# Altium PCB 光阵列板(打印).PcbDoc
Units mil, origin at the board's own origin, x right, y up, seen from the top; angles counter-clockwise.
Board outline 15655 x 8625 mil, 2 copper layers (Top Layer, Bottom Layer); 137 components, 77 nets, 470 pads, 0 vias.
Unrouted connection lines stored in the file: 7.
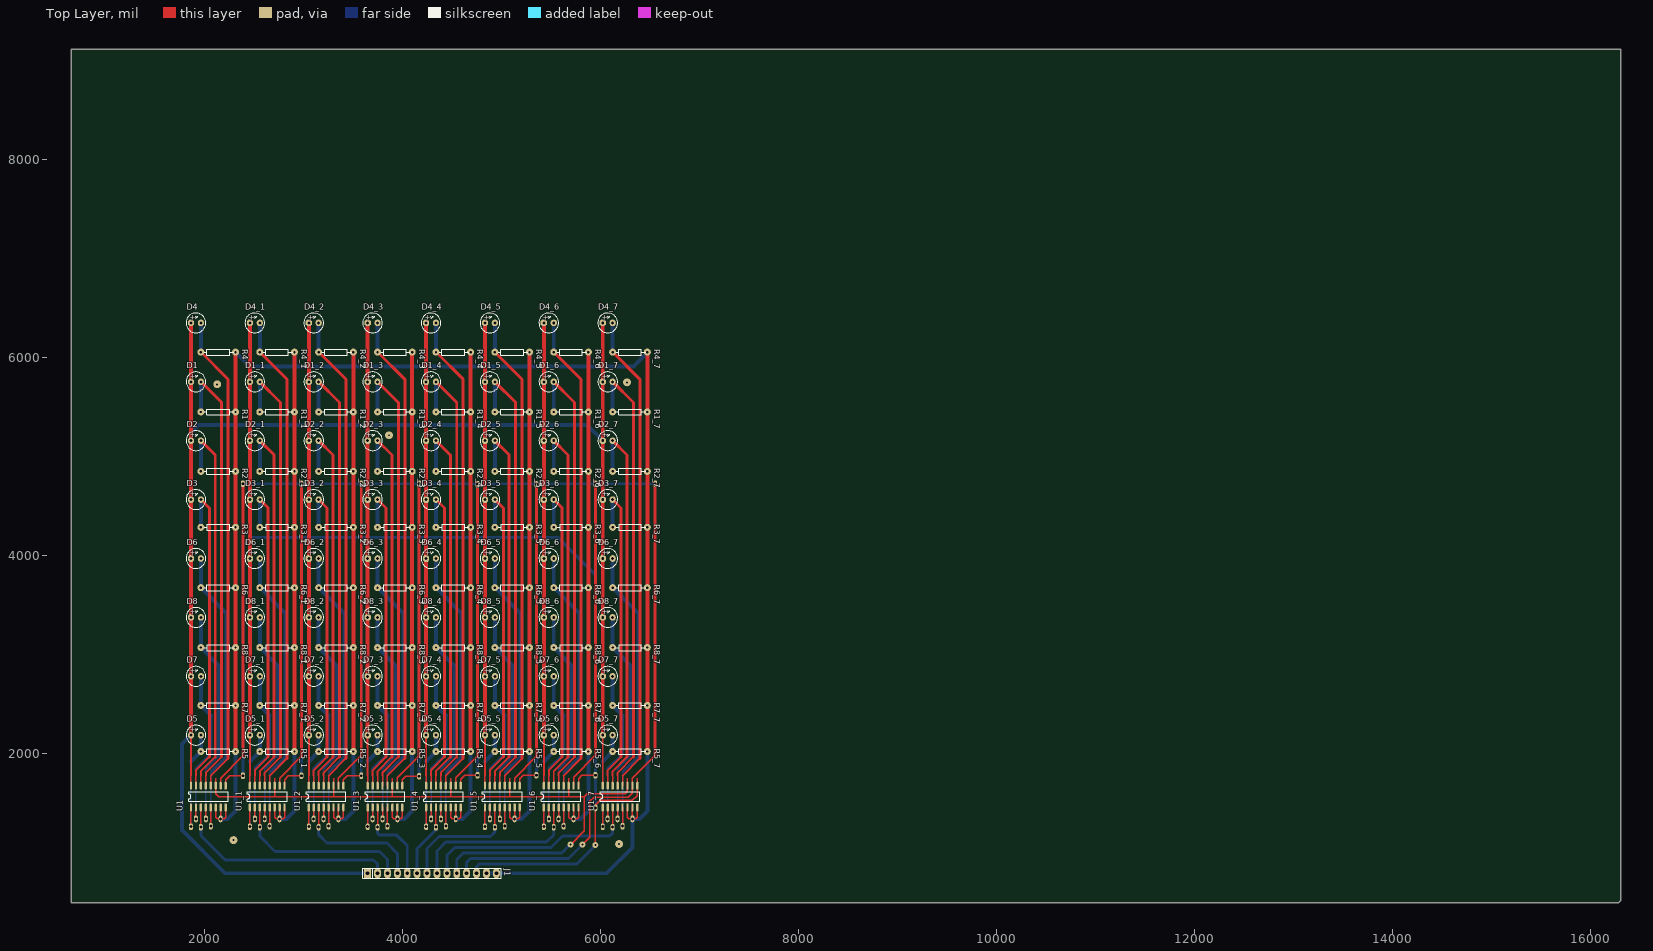
[diagram p0: Top Layer view]
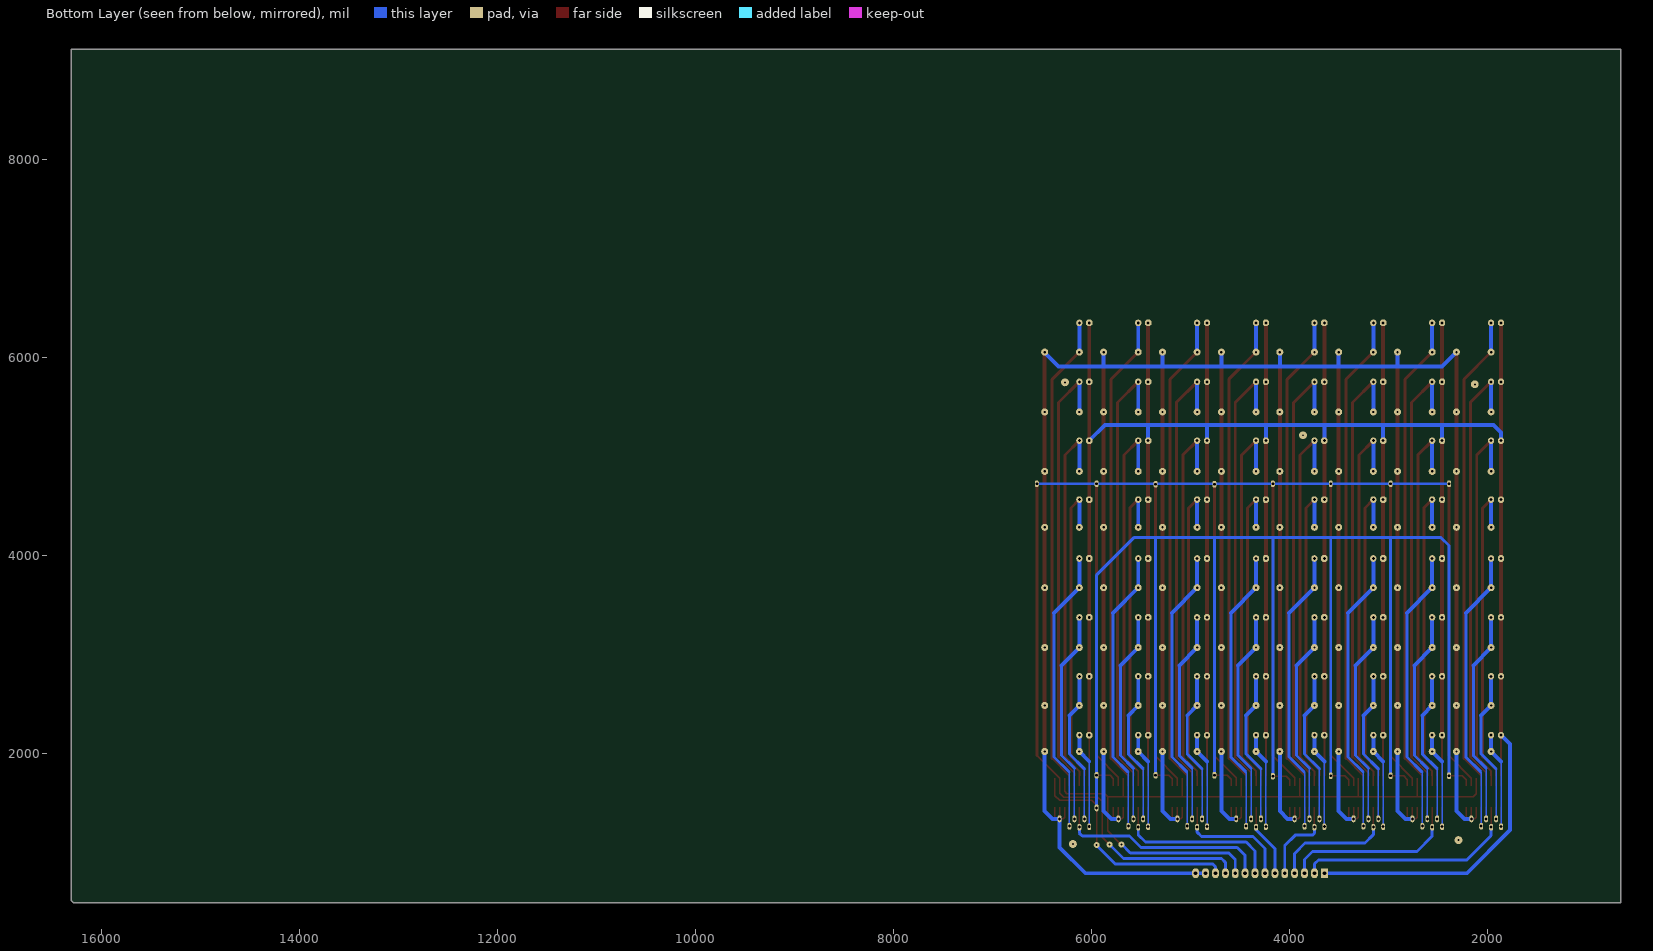
[diagram p1: Bottom Layer view, seen from below]

## Layer stack, top to bottom
Top Layer: signal copper 1.4
Dielectric: dielectric 12.6, FR-4, Dk 4.8
Bottom Layer: signal copper 1.4

## Board outline
655,490 655,9115 16310,9115 16310,515 16285,490

## Design rules (kind name [scope] priority, off if disabled: settings)
Clearance [All] p1: gap=10
ComponentClearance [All] p1 off: gap=10 collisioncheckmode=3 verticalgap=10 showdistances=FALSE
PolygonConnect [All] p1: connectstyle=Relief reliefconductorwidth=10 reliefentries=4 polygonreliefangle="90 Angle" airgapwidth=10
RoutingVias [All] p1: holewidth=28 width=50 viastyle="Through Hole" minholewidth=28 minwidth=50 maxholewidth=28 maxwidth=50
SilkscreenOverComponentPads [All] p1: minsilkscreentomaskgap=10
SolderMaskExpansion [All] p1: expansion=4
Width [All] p1: maxlimit=100 minlimit=10 preferedwidth=10
26 further rules are at their usual default settings.

## Classes and differential pairs
component class 光阵列版: D1 D2 D3 D4 D5 D6 D7 D8 D9 D10 D11 D12 D13 D14 D15 D16 D17 D18 D19 D20 D21 D22 D23 D24 D25 D26 D27 D28 D29 D30 D31 D32 D33 D34 D35 D36 D37 D38 D39 D40 D41 D42 D43 D44 D45 D46 D47 D48 D49 D50 D51 D52 D53 D54 D55 D56 D57 D58 D59 D60 D61 D62 D63 D64 J1 R1 R2 R3 R4 R5 R6 R7 R8 U1

## Components (designator, comment, footprint, x,y, rotation, side; value= is the part's Value field where it differs from the comment)
D1 "PHOTO" LED2 1865,5755 r0 top
D1_1 "PHOTO" LED2 2460,5755 r0 top (schematic designator D1)
D1_2 "PHOTO" LED2 3055,5755 r0 top (schematic designator D1)
D1_3 "PHOTO" LED2 3650,5755 r0 top (schematic designator D1)
D1_4 "PHOTO" LED2 4240,5755 r0 top (schematic designator D1)
D1_5 "PHOTO" LED2 4835,5755 r0 top (schematic designator D1)
D1_6 "PHOTO" LED2 5430,5755 r0 top (schematic designator D1)
D1_7 "PHOTO" LED2 6025,5755 r0 top (schematic designator D1)
D2 "PHOTO" LED2 1865,5160 r0 top
D2_1 "PHOTO" LED2 2460,5160 r0 top (schematic designator D2)
D2_2 "PHOTO" LED2 3055,5160 r0 top (schematic designator D2)
D2_3 "PHOTO" LED2 3650,5160 r0 top (schematic designator D2)
D2_4 "PHOTO" LED2 4240,5160 r0 top (schematic designator D2)
D2_5 "PHOTO" LED2 4835,5160 r0 top (schematic designator D2)
D2_6 "PHOTO" LED2 5430,5160 r0 top (schematic designator D2)
D2_7 "PHOTO" LED2 6025,5160 r0 top (schematic designator D2)
D3 "PHOTO" LED2 1865,4565 r0 top
D3_1 "PHOTO" LED2 2460,4565 r0 top (schematic designator D3)
D3_2 "PHOTO" LED2 3055,4565 r0 top (schematic designator D3)
D3_3 "PHOTO" LED2 3650,4565 r0 top (schematic designator D3)
D3_4 "PHOTO" LED2 4240,4565 r0 top (schematic designator D3)
D3_5 "PHOTO" LED2 4835,4565 r0 top (schematic designator D3)
D3_6 "PHOTO" LED2 5430,4565 r0 top (schematic designator D3)
D3_7 "PHOTO" LED2 6025,4565 r0 top (schematic designator D3)
D4 "PHOTO" LED2 1865,6350 r0 top
D4_1 "PHOTO" LED2 2460,6350 r0 top (schematic designator D4)
D4_2 "PHOTO" LED2 3055,6350 r0 top (schematic designator D4)
D4_3 "PHOTO" LED2 3650,6350 r0 top (schematic designator D4)
D4_4 "PHOTO" LED2 4240,6350 r0 top (schematic designator D4)
D4_5 "PHOTO" LED2 4835,6350 r0 top (schematic designator D4)
D4_6 "PHOTO" LED2 5430,6350 r0 top (schematic designator D4)
D4_7 "PHOTO" LED2 6025,6350 r0 top (schematic designator D4)
D5 "PHOTO" LED2 1865,2185 r0 top
D5_1 "PHOTO" LED2 2460,2185 r0 top (schematic designator D5)
D5_2 "PHOTO" LED2 3055,2185 r0 top (schematic designator D5)
D5_3 "PHOTO" LED2 3650,2185 r0 top (schematic designator D5)
D5_4 "PHOTO" LED2 4240,2185 r0 top (schematic designator D5)
D5_5 "PHOTO" LED2 4835,2185 r0 top (schematic designator D5)
D5_6 "PHOTO" LED2 5430,2185 r0 top (schematic designator D5)
D5_7 "PHOTO" LED2 6025,2185 r0 top (schematic designator D5)
D6 "PHOTO" LED2 1865,3970 r0 top
D6_1 "PHOTO" LED2 2460,3970 r0 top (schematic designator D6)
D6_2 "PHOTO" LED2 3055,3970 r0 top (schematic designator D6)
D6_3 "PHOTO" LED2 3650,3970 r0 top (schematic designator D6)
D6_4 "PHOTO" LED2 4240,3970 r0 top (schematic designator D6)
D6_5 "PHOTO" LED2 4835,3970 r0 top (schematic designator D6)
D6_6 "PHOTO" LED2 5430,3970 r0 top (schematic designator D6)
D6_7 "PHOTO" LED2 6025,3970 r0 top (schematic designator D6)
D7 "PHOTO" LED2 1865,2780 r0 top
D7_1 "PHOTO" LED2 2460,2780 r0 top (schematic designator D7)
D7_2 "PHOTO" LED2 3055,2780 r0 top (schematic designator D7)
D7_3 "PHOTO" LED2 3650,2780 r0 top (schematic designator D7)
D7_4 "PHOTO" LED2 4240,2780 r0 top (schematic designator D7)
D7_5 "PHOTO" LED2 4835,2780 r0 top (schematic designator D7)
D7_6 "PHOTO" LED2 5430,2780 r0 top (schematic designator D7)
D7_7 "PHOTO" LED2 6025,2780 r0 top (schematic designator D7)
D8 "PHOTO" LED2 1865,3375 r0 top
D8_1 "PHOTO" LED2 2460,3375 r0 top (schematic designator D8)
D8_2 "PHOTO" LED2 3055,3375 r0 top (schematic designator D8)
D8_3 "PHOTO" LED2 3650,3375 r0 top (schematic designator D8)
D8_4 "PHOTO" LED2 4240,3375 r0 top (schematic designator D8)
D8_5 "PHOTO" LED2 4835,3375 r0 top (schematic designator D8)
D8_6 "PHOTO" LED2 5430,3375 r0 top (schematic designator D8)
D8_7 "PHOTO" LED2 6025,3375 r0 top (schematic designator D8)
J1 "CON14" sip-14 3650,790 r0 top
R1 "RES" AXIAL0.3 1965,5450 r0 top
R1_1 "RES" AXIAL0.3 2560,5450 r0 top (schematic designator R1)
R1_2 "RES" AXIAL0.3 3155,5450 r0 top (schematic designator R1)
R1_3 "RES" AXIAL0.3 3750,5450 r0 top (schematic designator R1)
R1_4 "RES" AXIAL0.3 4340,5450 r0 top (schematic designator R1)
R1_5 "RES" AXIAL0.3 4935,5450 r0 top (schematic designator R1)
R1_6 "RES" AXIAL0.3 5530,5450 r0 top (schematic designator R1)
R1_7 "RES" AXIAL0.3 6125,5450 r0 top (schematic designator R1)
R2 "RES" AXIAL0.3 1965,4850 r0 top
R2_1 "RES" AXIAL0.3 2560,4850 r0 top (schematic designator R2)
R2_2 "RES" AXIAL0.3 3155,4850 r0 top (schematic designator R2)
R2_3 "RES" AXIAL0.3 3750,4850 r0 top (schematic designator R2)
R2_4 "RES" AXIAL0.3 4340,4850 r0 top (schematic designator R2)
R2_5 "RES" AXIAL0.3 4935,4850 r0 top (schematic designator R2)
R2_6 "RES" AXIAL0.3 5530,4850 r0 top (schematic designator R2)
R2_7 "RES" AXIAL0.3 6125,4850 r0 top (schematic designator R2)
R3 "RES" AXIAL0.3 1965,4285 r0 top
R3_1 "RES" AXIAL0.3 2560,4285 r0 top (schematic designator R3)
R3_2 "RES" AXIAL0.3 3155,4285 r0 top (schematic designator R3)
R3_3 "RES" AXIAL0.3 3750,4285 r0 top (schematic designator R3)
R3_4 "RES" AXIAL0.3 4340,4285 r0 top (schematic designator R3)
R3_5 "RES" AXIAL0.3 4935,4285 r0 top (schematic designator R3)
R3_6 "RES" AXIAL0.3 5530,4285 r0 top (schematic designator R3)
R3_7 "RES" AXIAL0.3 6125,4285 r0 top (schematic designator R3)
R4 "RES" AXIAL0.3 1965,6055 r0 top
R4_1 "RES" AXIAL0.3 2560,6055 r0 top (schematic designator R4)
R4_2 "RES" AXIAL0.3 3155,6055 r0 top (schematic designator R4)
R4_3 "RES" AXIAL0.3 3750,6055 r0 top (schematic designator R4)
R4_4 "RES" AXIAL0.3 4340,6055 r0 top (schematic designator R4)
R4_5 "RES" AXIAL0.3 4935,6055 r0 top (schematic designator R4)
R4_6 "RES" AXIAL0.3 5530,6055 r0 top (schematic designator R4)
R4_7 "RES" AXIAL0.3 6125,6055 r0 top (schematic designator R4)
R5 "RES" AXIAL0.3 1965,2020 r0 top
R5_1 "RES" AXIAL0.3 2560,2020 r0 top (schematic designator R5)
R5_2 "RES" AXIAL0.3 3155,2020 r0 top (schematic designator R5)
R5_3 "RES" AXIAL0.3 3750,2020 r0 top (schematic designator R5)
R5_4 "RES" AXIAL0.3 4340,2020 r0 top (schematic designator R5)
R5_5 "RES" AXIAL0.3 4935,2020 r0 top (schematic designator R5)
R5_6 "RES" AXIAL0.3 5530,2020 r0 top (schematic designator R5)
R5_7 "RES" AXIAL0.3 6125,2020 r0 top (schematic designator R5)
R6 "RES" AXIAL0.3 1965,3675 r0 top
R6_1 "RES" AXIAL0.3 2560,3675 r0 top (schematic designator R6)
R6_2 "RES" AXIAL0.3 3155,3675 r0 top (schematic designator R6)
R6_3 "RES" AXIAL0.3 3750,3675 r0 top (schematic designator R6)
R6_4 "RES" AXIAL0.3 4340,3675 r0 top (schematic designator R6)
R6_5 "RES" AXIAL0.3 4935,3675 r0 top (schematic designator R6)
R6_6 "RES" AXIAL0.3 5530,3675 r0 top (schematic designator R6)
R6_7 "RES" AXIAL0.3 6125,3675 r0 top (schematic designator R6)
R7 "RES" AXIAL0.3 1965,2485 r0 top
R7_1 "RES" AXIAL0.3 2560,2485 r0 top (schematic designator R7)
R7_2 "RES" AXIAL0.3 3155,2485 r0 top (schematic designator R7)
R7_3 "RES" AXIAL0.3 3750,2485 r0 top (schematic designator R7)
R7_4 "RES" AXIAL0.3 4340,2485 r0 top (schematic designator R7)
R7_5 "RES" AXIAL0.3 4935,2485 r0 top (schematic designator R7)
R7_6 "RES" AXIAL0.3 5530,2485 r0 top (schematic designator R7)
R7_7 "RES" AXIAL0.3 6125,2485 r0 top (schematic designator R7)
R8 "RES" AXIAL0.3 1965,3070 r0 top
R8_1 "RES" AXIAL0.3 2560,3070 r0 top (schematic designator R8)
R8_2 "RES" AXIAL0.3 3155,3070 r0 top (schematic designator R8)
R8_3 "RES" AXIAL0.3 3750,3070 r0 top (schematic designator R8)
R8_4 "RES" AXIAL0.3 4340,3070 r0 top (schematic designator R8)
R8_5 "RES" AXIAL0.3 4935,3070 r0 top (schematic designator R8)
R8_6 "RES" AXIAL0.3 5530,3070 r0 top (schematic designator R8)
R8_7 "RES" AXIAL0.3 6125,3070 r0 top (schematic designator R8)
U1 "4051" SO-16 1865,1455 r90 top
U1_1 "4051" SO-16 2460,1455 r90 top (schematic designator U1)
U1_2 "4051" SO-16 3055,1455 r90 top (schematic designator U1)
U1_3 "4051" SO-16 3650,1455 r90 top (schematic designator U1)
U1_4 "4051" SO-16 4240,1455 r90 top (schematic designator U1)
U1_5 "4051" SO-16 4835,1455 r90 top (schematic designator U1)
U1_6 "4051" SO-16 5430,1455 r90 top (schematic designator U1)
U1_7 "4051" SO-16 6025,1455 r90 top (schematic designator U1)

## Footprints (in the part's own frame and the unit in brackets; to place one, negate y for a bottom-side part, rotate by r counter-clockwise, add the part's x,y. Pads: shape width x height; smd on the part's side, far side on the other; paste and mask are expansions set on the pad)
AXIAL0.3 [mm]
  round 1.8 hole 0.6: 1(0,0) 2(8.89,0)
  silkscreen extent 0.81,-0.76 8.43,0.76
LED2 [mm]
  oct 1.6x1.7 hole 0.762: 1(0,0)
  oval 1.6x1.7 hole 0.762: 2(2.54,0)
  silkscreen extent -1.26,-2.53 3.8,2.53
sip-14 [mil]
  rect 70x100 hole 40: 1(0,0)
  oval 70x100 hole 40: 2(100,0) 3(200,0) 4(300,0) 5(400,0) 6(500,0) 7(600,0) 8(700,0) 9(800,0) 10(900,0) 11(1000,0) 12(1100,0) 13(1200,0) 14(1300,0)
  silkscreen extent -50,-50 1351,50
SO-16 [mil]
  oval 80x24 smd: 1(0,0) 2(0,-50) 3(0,-100) 4(0,-150) 5(0,-200) 6(0,-250) 7(0,-300) 8(0,-350) 9(220,-350) 10(220,-300) 11(220,-250) 12(220,-200) 13(220,-150) 14(220,-100) 15(220,-50) 16(220,0)
  silkscreen extent 60,-375 160,25

## Free pads (board coordinates)
  oval 40x70 hole 30: 0(2980,4725) 1(3585,4725) 2(1865,1260) 2(2460,1260) 2(3055,1260) 2(3650,1260) 2(4170,4725) 2(4240,1260) 2(4835,1260) 2(5430,1260) 2(6025,1260) 3(1915,1340) 3(2510,1340) 3(3105,1340) 3(3700,1340) 3(4290,1340) 3(4760,4720) 3(4885,1340) 3(5480,1340) 3(6075,1340) 4(2015,1340) 4(2610,1340) 4(3205,1340) 4(3800,1340) 4(4390,1340) 4(4985,1340) 4(5355,4720) 4(5580,1340) 4(6175,1340) 5(2065,1265) 5(2660,1265) 5(3255,1265) 5(3850,1265) 5(4440,1265) 5(5035,1265) 5(5630,1265) 5(5950,4725) 5(6225,1265) 6(1965,1255) 6(2560,1255) 6(3155,1255) 6(3750,1255) 6(4340,1255) 6(4935,1255) 6(5530,1255) 6(6125,1255) 6(6555,4725) 7(2165,1340) 7(2760,1340) 7(2980,1775) 7(3355,1340) 7(3950,1340) 7(4540,1340) 7(5135,1340) 7(5730,1340) 7(6325,1340) 8(2390,4725) 8(3585,1775) 9(2390,1775) 9(4170,1770) 10(4760,1780) 11(5355,1780) 12(5950,1780) 13(5950,1450)
  round 80 hole 20: 3(6190,1085) 4(2295,1125) 5(2130,5730) 6(6270,5750) 7(3865,5215)
  round 60 hole 20: 16(5700,1080) 17(5820,1080) 18(5950,1075)

## Nets (pads, with @x,y where several pads share a name; then routed paths per layer and width w, separated by ;. In a path a pad name is that pad's centre, name@x,y a point inside that pad or via, vN(x,y) a via of type N, cw(c..) or ccw(c..) an arc to the next point about the centre after c; other vN are vias at no path point)
+5V: D1.1 D1_1.1 D1_2.1 D1_3.1 D1_4.1 D1_5.1 D1_6.1 D1_7.1 D2.1 D2_1.1 D2_2.1 D2_3.1 D2_4.1 D2_5.1 D2_6.1 D2_7.1 D3.1 D3_1.1 D3_2.1 D3_3.1 D3_4.1 D3_5.1 D3_6.1 D3_7.1 D4.1 D4_1.1 D4_2.1 D4_3.1 D4_4.1 D4_5.1 D4_6.1 D4_7.1 D5.1 D5_1.1 D5_2.1 D5_3.1 D5_4.1 D5_5.1 D5_6.1 D5_7.1 D6.1 D6_1.1 D6_2.1 D6_3.1 D6_4.1 D6_5.1 D6_6.1 D6_7.1 D7.1 D7_1.1 D7_2.1 D7_3.1 D7_4.1 D7_5.1 D7_6.1 D7_7.1 D8.1 D8_1.1 D8_2.1 D8_3.1 D8_4.1 D8_5.1 D8_6.1 D8_7.1 J1.1 U1.16 U1_1.16 U1_2.16 U1_3.16 U1_4.16 U1_5.16 U1_6.16 U1_7.16 | length 45749.8
  Top Layer w15: U1.16 1865,1775 ; U1_1.16 2460,1775 ; U1_2.16 3055,1775 ; U1_3.16 3650,1775 ; U1_4.16 4240,1775 ; U1_5.16 4835,1775 ; U1_6.16 5430,1775 ; U1_7.16 6025,1775
  Top Layer w20: 1865,1775 D5.1 ; 2460,1775 D5_1.1 ; 3055,1775 D5_2.1 ; 3650,1775 D5_3.1 ; 4240,1775 D5_4.1 ; 4835,1775 D5_5.1 ; 5430,1775 D5_6.1 ; 6025,1775 D5_7.1
  Top Layer w40: D5.1 D7.1 D8.1 D6.1 D3.1 D2.1 D1.1 D4.1 ; D5_1.1 D7_1.1 D8_1.1 D6_1.1 D3_1.1 D2_1.1 D1_1.1 D4_1.1 ; D5_2.1 D7_2.1 D8_2.1 D6_2.1 D3_2.1 D2_2.1 D1_2.1 D4_2.1 ; D5_3.1 D7_3.1 D8_3.1 D6_3.1 D3_3.1 D2_3.1 D1_3.1 D4_3.1 ; D5_4.1 D7_4.1 D8_4.1 D6_4.1 D3_4.1 D2_4.1 D1_4.1 D4_4.1 ; D5_5.1 D7_5.1 D8_5.1 D6_5.1 D3_5.1 D2_5.1 D1_5.1 D4_5.1 ; D5_6.1 D7_6.1 D8_6.1 D6_6.1 D3_6.1 D2_6.1 D1_6.1 D4_6.1 ; D5_7.1 D7_7.1 D8_7.1 D6_7.1 D3_7.1 D2_7.1 D1_7.1 D4_7.1
  Bottom Layer w40: D5.1 1775,2095 1775,1225 2210,790 J1.1 ; D2.1 1865,5245 1940,5320 2460,5320 ; D2_1.1 2460,5320 ; D2_2.1 3055,5320 ; D2_3.1 3650,5320 ; D2_4.1 4240,5320 ; D2_5.1 4835,5315 ; D2_6.1 5430,5320 ; D2_7.1 5865,5320 5430,5320 ; 2460,5320 3055,5320 ; 3055,5320 3650,5320 ; 3650,5320 4240,5320 ; 4240,5320 5430,5320
A: J1.10 pad.16 U1.11 U1_1.11 U1_2.11 U1_3.11 U1_4.11 U1_5.11 U1_6.11 U1_7.11 | length 7487.4
  Top Layer w15: 2115,1750 U1.11 2115,1595 2145,1565 2710,1565 ; 2710,1750 U1_1.11 2710,1565 ; 3305,1750 U1_2.11 3305,1565 ; 3900,1750 U1_3.11 3900,1565 ; 4490,1750 U1_4.11 4490,1565 ; 5085,1750 U1_5.11 5085,1565 ; 5680,1750 U1_6.11 5680,1565 ; pad.16 5840,1220 5840,1565 ; 6275,1750 U1_7.11 6275,1620 6250,1595 5870,1595 5840,1565 ; 2710,1565 3305,1565 ; 3305,1565 3900,1565 ; 3900,1565 4490,1565 ; 4490,1565 5085,1565 ; 5085,1565 5680,1565 ; 5680,1565 5840,1565
  Bottom Layer w30: J1.10 4550,930 4615,995 5610,995 pad.16@5700,1085
ADC0: J1.2 pad.6@1965,1255 U1.3 | length 2283.1
  Top Layer w15: pad.6@1965,1255 U1.3
  Bottom Layer w30: pad.6@1965,1255 1965,1170 2210,925 3710,925 3750,885 J1.2
ADC1: J1.3 pad.6@2560,1255 | length 1617.3
  Bottom Layer w30: pad.6@2560,1255 2560,1165 2715,1010 3770,1010 3850,930 J1.3
ADC2: J1.4 pad.6@3155,1255 | length 1148.7
  Bottom Layer w30: pad.6@3155,1255 3155,1180 3240,1095 3845,1095 3950,990 J1.4
ADC3: J1.5 pad.6@3750,1255 | length 691.8
  Bottom Layer w30: pad.6@3750,1255 3750,1195 3770,1175 3945,1175 4050,1070 J1.5
ADC4: J1.6 pad.6@4340,1255 | length 543.7
  Bottom Layer w30: J1.6 4150,1040 4340,1230 pad.6@4340,1255
ADC5: J1.7 pad.6@4935,1255 | length 1053.3
  Bottom Layer w30: J1.7 4250,1040 4370,1160 4890,1160 4935,1205 pad.6@4935,1255
ADC6: J1.8 pad.6@5530,1255 | length 1549.8
  Bottom Layer w30: J1.8 4350,1015 4440,1105 5457.5,1105 5530,1177.5 pad.6@5530,1255
ADC7: J1.9 pad.6@6125,1255 | length 2008.2
  Bottom Layer w30: J1.9 4450,970 4530,1050 5502.5,1050 5617.5,1165 6095,1165 6125,1195 pad.6@6125,1255
B: J1.11 pad.0 pad.1 pad.2@4170,4725 pad.3@4760,4720 pad.4@5355,4720 pad.5@5950,4725 pad.6@6555,4725 pad.8@2390,4725 pad.17 U1.10 U1_1.10 U1_2.10 U1_3.10 U1_4.10 U1_5.10 U1_6.10 U1_7.10 | length 31674.3
  Top Layer w15: U1.10 2165,1750 2390,1975 ; U1_1.10 2760,1750 2980,1970 ; U1_2.10 3355,1750 3585,1980 ; U1_3.10 3950,1755 4170,1975 ; U1_4.10 4540,1755 4760,1975 ; U1_5.10 5135,1750 5355,1970 ; U1_6.10 5730,1760 5950,1980 ; pad.17@5815,1075 5895,1155 5895,1515 5940,1560 6285,1560 6325,1600 U1_7.10 6325,1750 6555,1980
  Top Layer w30: 2390,1975 pad.8@2390,4725 ; 2980,1970 pad.0 ; 3585,1980 pad.1 ; 4170,1975 pad.2@4170,4725 ; 4760,1975 pad.3@4760,4720 ; 5355,1970 pad.4@5355,4720 ; 5950,1980 pad.5@5950,4725 ; 6555,1980 pad.6@6555,4725
  Bottom Layer w30: pad.8@2390,4725 pad.6@6560,4725 ; J1.11 4650,900 4690,940 5680,940 pad.17@5825,1085
C: J1.12 pad.7@2980,1775 pad.8@3585,1775 pad.9 pad.10 pad.11 pad.12 pad.13 pad.18 U1.9 U1_1.9 U1_2.9 U1_3.9 U1_4.9 U1_5.9 U1_6.9 U1_7.9 | length 24609.3
  Top Layer w15: U1.9 2215,1735 2255,1775 pad.9@2390,1775 ; U1_1.9 2810,1735 2850,1775 pad.7@2980,1775 ; U1_2.9 3405,1735 3445,1775 pad.8@3585,1775 ; U1_3.9 4000,1735 4035,1770 pad.9@4170,1770 ; U1_4.9 4590,1740 4630,1780 pad.10 ; U1_5.9 5185,1745 5220,1780 pad.11 ; U1_6.9 5780,1745 5815,1780 pad.12 ; pad.18 pad.13 5950,1475 6000,1525 6325,1525 6375,1575 U1_7.9 6375,1750
  Bottom Layer w30: pad.9@2390,1775 2390,4100 2470,4180 2980,4180 ; pad.7@2980,1775 2980,4180 ; pad.8@3585,1775 3585,4175 ; pad.9@4170,1770 4170,4180 ; J1.12 4750,855 4780,885 5765,885 pad.18@5957.5,1077.5 ; pad.10 4760,4180 ; pad.11 5355,4180 ; pad.13 pad.12 5950,3805 5575,4180 5355,4180 ; 2980,4180 4170,4180 ; 4170,4180 4760,4180 ; 4760,4180 5355,4180
GND: J1.13 J1.14 pad.7@2165,1340 pad.7@6325,1340 R1.2 R2.2 R3.2 R4.2 R4_1.2 R4_2.2 R4_3.2 R4_4.2 R4_5.2 R4_6.2 R4_7.2 R5.2 R6.2 R7.2 R8.2 U1.6 U1.7 U1.8 | length 12269.2
  Top Layer w15: U1.6 2115,1355 2130,1340 pad.7@2165,1340 ; U1.7 pad.7@2165,1340 ; U1.8 2215,1355 2200,1340 pad.7@2165,1340
  Top Layer w40: R5.2 R7.2 R8.2 R6.2 R3.2 R2.2 R1.2 R4.2
  Bottom Layer w40: pad.7@2165,1340 2235,1340 2315,1420 R5.2 ; R4.2 2460,5910 2910,5910 ; R4_1.2 2910,5910 ; R4_2.2 3505,5910 ; R4_3.2 4100,5910 ; R4_4.2 4690,5910 ; J1.13 J1.14 6065,790 6325,1050 pad.7@6325,1340 ; R4_5.2 5285,5910 ; R4_6.2 5880,5910 ; R4_7.2@6470,6055 6470,6045 6335,5910 5880,5910 ; 2910,5910 3505,5910 ; 3505,5910 4100,5910 ; 4100,5910 4690,5910 ; 4690,5910 5285,5910 ; 5285,5910 5880,5910
NetD1_2: D1.2 R1.1 U1.13 | length 4538.3
  Top Layer w15: U1.13 2015,1775
  Top Layer w20: 2015,1775 2015,1805 2175,1965
  Top Layer w30: D1.2 2175,5545 2175,1965
  Bottom Layer w40: R1.1 D1.2
NetD2_2: D2.2 R2.1 U1.14 | length 3915.1
  Top Layer w15: U1.14 1965,1775
  Top Layer w20: 1965,1775 1965,1820 2110,1965
  Top Layer w30: D2.2 2110,5015 2110,1965
  Bottom Layer w40: R2.1 D2.2
NetD3_2: D3.2 R3.1 U1.15 | length 3261.1
  Top Layer w15: U1.15 1915,1775
  Top Layer w20: 1915,1775 1915,1830 2050,1965
  Top Layer w30: D3.2 2050,4480 2050,1965
  Bottom Layer w40: R3.1 D3.2
NetD4_2: D4.2 R4.1 U1.12 | length 4861.4
  Top Layer w15: U1.12 2065,1775
  Top Layer w20: 2065,1775 2240,1950
  Top Layer w30: R4.1 2240,5780 2240,1950
  Bottom Layer w40: R4.1 D4.2
NetD5_2: D5.2 pad.2@1865,1260 R5.1 U1.1 | length 1161.4
  Top Layer w15: pad.2@1865,1260 U1.1
  Bottom Layer w15: pad.2@1865,1260 1865,1920
  Bottom Layer w40: 1865,1920 R5.1 D5.2
NetD6_2: D6.2 pad.5@2065,1265 R6.1 U1.5 | length 3064.8
  Top Layer w15: pad.5@2065,1265 U1.5
  Bottom Layer w15: pad.5@2065,1265 2065,1810 2070,1815
  Bottom Layer w30: 2070,1815 2220,1965 2220,3420
  Bottom Layer w40: D6.2 R6.1 2220,3420
NetD7_2: D7.2 pad.3@1915,1340 R7.1 U1.2 | length 1658.6
  Top Layer w15: pad.3@1915,1340 U1.2
  Bottom Layer w15: pad.3@1915,1340 1915,1845
  Bottom Layer w30: 1915,1845 2065,1995 2065,2385
  Bottom Layer w40: D7.2 R7.1 2065,2385
NetD8_2: D8.2 pad.4@2015,1340 R8.1 U1.4 | length 2278.4
  Top Layer w15: pad.4@2015,1340 U1.4
  Bottom Layer w15: pad.4@2015,1340 2015,1850
  Bottom Layer w30: 2015,1850 2145,1980 2145,2890
  Bottom Layer w40: D8.2 R8.1 2145,2890
NetD9_2: 
NetD10_2: 
NetD11_2: 
NetD12_2: 
NetD13_2: 
NetD14_2: 
NetD15_2: 
NetD16_2: D5_1.2 D5_2.2 D5_3.2 D5_4.2 D5_5.2 D5_6.2 D5_7.2 pad.2@2460,1260 pad.2@3055,1260 pad.2@3650,1260 pad.2@4240,1260 pad.2@4835,1260 pad.2@5430,1260 pad.2@6025,1260 R5_1.1 R5_2.1 R5_3.1 R5_4.1 R5_5.1 R5_6.1 R5_7.1 U1_1.1 U1_2.1 U1_3.1 U1_4.1 U1_5.1 U1_6.1 U1_7.1 | length 8129.9
  Top Layer w15: pad.2@2460,1260 U1_1.1 ; pad.2@3055,1260 U1_2.1 ; pad.2@3650,1260 U1_3.1 ; pad.2@4240,1260 U1_4.1 ; pad.2@4835,1260 U1_5.1 ; pad.2@5430,1260 U1_6.1 ; pad.2@6025,1260 U1_7.1
  Bottom Layer w15: pad.2@2460,1260 2460,1920 ; pad.2@3055,1260 3055,1920 ; pad.2@3650,1260 3650,1920 ; pad.2@4240,1260 4240,1920 ; pad.2@4835,1260 4835,1920 ; pad.2@5430,1260 5430,1920 ; pad.2@6025,1260 6025,1920
  Bottom Layer w40: 2460,1920 R5_1.1 D5_1.2 ; 3055,1920 R5_2.1 D5_2.2 ; 3650,1920 R5_3.1 D5_3.2 ; 4240,1920 R5_4.1 D5_4.2 ; 4835,1920 R5_5.1 D5_5.2 ; 5430,1920 R5_6.1 D5_6.2 ; 6025,1920 R5_7.1 D5_7.2
NetD17_2: 
NetD18_2: 
NetD19_2: 
NetD20_2: 
NetD21_2: 
NetD22_2: 
NetD23_2: 
NetD24_2: 
NetD25_2: 
NetD26_2: 
NetD27_2: 
NetD28_2: 
NetD29_2: 
NetD30_2: 
NetD31_2: 
NetD32_2: 
NetD33_2: 
NetD34_2: 
NetD35_2: 
NetD36_2: 
NetD37_2: 
NetD38_2: 
NetD39_2: 
NetD40_2: 
NetD41_2: 
NetD42_2: 
NetD43_2: 
NetD44_2: 
NetD45_2: 
NetD46_2: 
NetD47_2: 
NetD48_2: 
NetD49_2: 
NetD50_2: 
NetD51_2: 
NetD52_2: 
NetD53_2: 
NetD54_2: 
NetD55_2: 
NetD56_2: 
NetD57_2: 
NetD58_2: 
NetD59_2: 
NetD60_2: 
NetD61_2: 
NetD62_2: 
NetD63_2: 
NetD64_2: 
pads on no net: D1_1.2 D1_2.2 D1_3.2 D1_4.2 D1_5.2 D1_6.2 D1_7.2 D2_1.2 D2_2.2 D2_3.2 D2_4.2 D2_5.2 D2_6.2 D2_7.2 D3_1.2 D3_2.2 D3_3.2 D3_4.2 D3_5.2 D3_6.2 D3_7.2 D4_1.2 D4_2.2 D4_3.2 D4_4.2 D4_5.2 D4_6.2 D4_7.2 D6_1.2 D6_2.2 D6_3.2 D6_4.2 D6_5.2 D6_6.2 D6_7.2 D7_1.2 D7_2.2 D7_3.2 D7_4.2 D7_5.2 D7_6.2 D7_7.2 D8_1.2 D8_2.2 D8_3.2 D8_4.2 D8_5.2 D8_6.2 D8_7.2 R1_1.1 R1_1.2 R1_2.1 R1_2.2 R1_3.1 R1_3.2 R1_4.1 R1_4.2 R1_5.1 R1_5.2 R1_6.1 R1_6.2 R1_7.1 R1_7.2 R2_1.1 R2_1.2 R2_2.1 R2_2.2 R2_3.1 R2_3.2 R2_4.1 R2_4.2 R2_5.1 R2_5.2 R2_6.1 R2_6.2 R2_7.1 R2_7.2 R3_1.1 R3_1.2 R3_2.1 R3_2.2 R3_3.1 R3_3.2 R3_4.1 R3_4.2 R3_5.1 R3_5.2 R3_6.1 R3_6.2 R3_7.1 R3_7.2 R4_1.1 R4_2.1 R4_3.1 R4_4.1 R4_5.1 R4_6.1 R4_7.1 R5_1.2 R5_2.2 R5_3.2 R5_4.2 R5_5.2 R5_6.2 R5_7.2 R6_1.1 R6_1.2 R6_2.1 R6_2.2 R6_3.1 R6_3.2 R6_4.1 R6_4.2 R6_5.1 R6_5.2 R6_6.1 R6_6.2 R6_7.1 R6_7.2 R7_1.1 R7_1.2 R7_2.1 R7_2.2 R7_3.1 R7_3.2 R7_4.1 R7_4.2 R7_5.1 R7_5.2 R7_6.1 R7_6.2 R7_7.1 R7_7.2 R8_1.1 R8_1.2 R8_2.1 R8_2.2 R8_3.1 R8_3.2 R8_4.1 R8_4.2 R8_5.1 R8_5.2 R8_6.1 R8_6.2 R8_7.1 R8_7.2 U1_1.2 U1_1.3 U1_1.4 U1_1.5 U1_1.6 U1_1.7 U1_1.8 U1_1.12 U1_1.13 U1_1.14 U1_1.15 U1_2.2 U1_2.3 U1_2.4 U1_2.5 U1_2.6 U1_2.7 U1_2.8 U1_2.12 U1_2.13 U1_2.14 U1_2.15 U1_3.2 U1_3.3 U1_3.4 U1_3.5 U1_3.6 U1_3.7 U1_3.8 U1_3.12 U1_3.13 U1_3.14 U1_3.15 U1_4.2 U1_4.3 U1_4.4 U1_4.5 U1_4.6 U1_4.7 U1_4.8 U1_4.12 U1_4.13 U1_4.14 U1_4.15 U1_5.2 U1_5.3 U1_5.4 U1_5.5 U1_5.6 U1_5.7 U1_5.8 U1_5.12 U1_5.13 U1_5.14 U1_5.15 U1_6.2 U1_6.3 U1_6.4 U1_6.5 U1_6.6 U1_6.7 U1_6.8 U1_6.12 U1_6.13 U1_6.14 U1_6.15 U1_7.2 U1_7.3 U1_7.4 U1_7.5 U1_7.6 U1_7.7 U1_7.8 U1_7.12 U1_7.13 U1_7.14 U1_7.15
copper on no net: | length 203162.8
  Top Layer w15: 2510,1340 2510,1455 ; 2510,1675 2510,1775 ; 2560,1255 2560,1455 ; 2560,1675 2560,1775 ; 2610,1340 2610,1455 ; 2610,1675 2610,1775 ; 2660,1265 2660,1455 ; 2660,1675 2660,1775 ; 2710,1455 2710,1355 2725,1340 2760,1340 ; 2760,1455 2760,1340 ; 2810,1455 2810,1355 2795,1340 2760,1340 ; 3105,1340 3105,1455 ; 3105,1675 3105,1775 ; 3155,1255 3155,1455 ; 3155,1675 3155,1775 ; 3205,1340 3205,1455 ; 3205,1675 3205,1775 ; 3255,1265 3255,1455 ; 3255,1675 3255,1775 ; 3305,1455 3305,1355 3320,1340 3355,1340 ; 3355,1455 3355,1340 ; 3405,1455 3405,1355 3390,1340 3355,1340 ; 3700,1340 3700,1455 ; 3700,1675 3700,1775 ; 3750,1255 3750,1455 ; 3750,1675 3750,1775 ; 3800,1340 3800,1455 ; 3800,1675 3800,1775 ; 3850,1265 3850,1455 ; 3850,1675 3850,1775 ; 3900,1455 3900,1355 3915,1340 3950,1340 ; 3950,1455 3950,1340 ; 4000,1455 4000,1355 3985,1340 3950,1340 ; 4290,1340 4290,1455 ; 4290,1675 4290,1775 ; 4340,1255 4340,1455 ; 4340,1675 4340,1775 ; 4390,1340 4390,1455 ; 4390,1675 4390,1775 ; 4440,1265 4440,1455 ; 4440,1675 4440,1775 ; 4490,1455 4490,1355 4505,1340 4540,1340 ; 4540,1455 4540,1340 ; 4590,1455 4590,1355 4575,1340 4540,1340 ; 4885,1340 4885,1455 ; 4885,1675 4885,1775 ; 4935,1255 4935,1455 ; 4935,1675 4935,1775 ; 4985,1340 4985,1455 ; 4985,1675 4985,1775 ; 5035,1265 5035,1455 ; 5035,1675 5035,1775 ; 5085,1455 5085,1355 5100,1340 5135,1340 ; 5135,1455 5135,1340 ; 5185,1455 5185,1355 5170,1340 5135,1340 ; 5480,1340 5480,1455 ; 5480,1675 5480,1775 ; 5530,1255 5530,1455 ; 5530,1675 5530,1775 ; 5580,1340 5580,1455 ; 5580,1675 5580,1775 ; 5630,1265 5630,1455 ; 5630,1675 5630,1775 ; 5680,1455 5680,1355 5695,1340 5730,1340 ; 5730,1455 5730,1340 ; 5780,1455 5780,1355 5765,1340 5730,1340 ; 6075,1340 6075,1455 ; 6075,1675 6075,1775 ; 6125,1255 6125,1455 ; 6125,1675 6125,1775 ; 6175,1340 6175,1455 ; 6175,1675 6175,1775 ; 6225,1265 6225,1455 ; 6225,1675 6225,1775 ; 6275,1455 6275,1355 6290,1340 6325,1340 ; 6325,1455 6325,1340 ; 6375,1455 6375,1355 6360,1340 6325,1340
  Top Layer w20: 2510,1775 2510,1830 2645,1965 ; 2560,1775 2560,1820 2705,1965 ; 2610,1775 2610,1805 2770,1965 ; 2660,1775 2835,1950 ; 3105,1775 3105,1830 3240,1965 ; 3155,1775 3155,1820 3300,1965 ; 3205,1775 3205,1805 3365,1965 ; 3255,1775 3430,1950 ; 3700,1775 3700,1830 3835,1965 ; 3750,1775 3750,1820 3895,1965 ; 3800,1775 3800,1805 3960,1965 ; 3850,1775 4025,1950 ; 4290,1775 4290,1830 4425,1965 ; 4340,1775 4340,1820 4485,1965 ; 4390,1775 4390,1805 4550,1965 ; 4440,1775 4615,1950 ; 4885,1775 4885,1830 5020,1965 ; 4935,1775 4935,1820 5080,1965 ; 4985,1775 4985,1805 5145,1965 ; 5035,1775 5210,1950 ; 5480,1775 5480,1830 5615,1965 ; 5530,1775 5530,1820 5675,1965 ; 5580,1775 5580,1805 5740,1965 ; 5630,1775 5805,1950 ; 6075,1775 6075,1830 6210,1965 ; 6125,1775 6125,1820 6270,1965 ; 6175,1775 6175,1805 6335,1965 ; 6225,1775 6400,1950
  Top Layer w30: 2560,4565 2645,4480 2645,1965 ; 2560,5160 2705,5015 2705,1965 ; 2560,5755 2770,5545 2770,1965 ; 2560,6055 2835,5780 2835,1950 ; 3155,4565 3240,4480 3240,1965 ; 3155,5160 3300,5015 3300,1965 ; 3155,5755 3365,5545 3365,1965 ; 3155,6055 3430,5780 3430,1950 ; 3750,4565 3835,4480 3835,1965 ; 3750,5160 3895,5015 3895,1965 ; 3750,5755 3960,5545 3960,1965 ; 3750,6055 4025,5780 4025,1950 ; 4340,4565 4425,4480 4425,1965 ; 4340,5160 4485,5015 4485,1965 ; 4340,5755 4550,5545 4550,1965 ; 4340,6055 4615,5780 4615,1950 ; 4935,4565 5020,4480 5020,1965 ; 4935,5160 5080,5015 5080,1965 ; 4935,5755 5145,5545 5145,1965 ; 4935,6055 5210,5780 5210,1950 ; 5530,4565 5615,4480 5615,1965 ; 5530,5160 5675,5015 5675,1965 ; 5530,5755 5740,5545 5740,1965 ; 5530,6055 5805,5780 5805,1950 ; 6125,4565 6210,4480 6210,1965 ; 6125,5160 6270,5015 6270,1965 ; 6125,5755 6335,5545 6335,1965 ; 6125,6055 6400,5780 6400,1950
  Top Layer w40: 2910,2020 2910,2485 2910,3070 2910,3675 2910,4285 2910,4850 2910,5450 2910,6055 ; 3505,2020 3505,2485 3505,3070 3505,3675 3505,4285 3505,4850 3505,5450 3505,6055 ; 4100,2020 4100,2485 4100,3070 4100,3675 4100,4285 4100,4850 4100,5450 4100,6055 ; 4690,2020 4690,2485 4690,3070 4690,3675 4690,4285 4690,4850 4690,5450 4690,6055 ; 5285,2020 5285,2485 5285,3070 5285,3675 5285,4285 5285,4850 5285,5450 5285,6055 ; 5880,2020 5880,2485 5880,3070 5880,3675 5880,4285 5880,4850 5880,5450 5880,6055 ; 6475,2020 6475,2485 6475,3070 6475,3675 6475,4285 6475,4850 6475,5450 6475,6055
  Bottom Layer w15: 2510,1340 2510,1845 ; 2610,1340 2610,1850 ; 2660,1265 2660,1810 2665,1815 ; 3105,1340 3105,1845 ; 3205,1340 3205,1850 ; 3255,1265 3255,1810 3260,1815 ; 3700,1340 3700,1845 ; 3800,1340 3800,1850 ; 3850,1265 3850,1810 3855,1815 ; 4290,1340 4290,1845 ; 4390,1340 4390,1850 ; 4440,1265 4440,1810 4445,1815 ; 4885,1340 4885,1845 ; 4985,1340 4985,1850 ; 5035,1265 5035,1810 5040,1815 ; 5480,1340 5480,1845 ; 5580,1340 5580,1850 ; 5630,1265 5630,1810 5635,1815 ; 6075,1340 6075,1845 ; 6175,1340 6175,1850 ; 6225,1265 6225,1810 6230,1815
  Bottom Layer w30: 2510,1845 2660,1995 2660,2385 ; 2610,1850 2740,1980 2740,2890 ; 2665,1815 2815,1965 2815,3420 ; 3105,1845 3255,1995 3255,2385 ; 3205,1850 3335,1980 3335,2890 ; 3260,1815 3410,1965 3410,3420 ; 3700,1845 3850,1995 3850,2385 ; 3800,1850 3930,1980 3930,2890 ; 3855,1815 4005,1965 4005,3420 ; 4290,1845 4440,1995 4440,2385 ; 4390,1850 4520,1980 4520,2890 ; 4445,1815 4595,1965 4595,3420 ; 4885,1845 5035,1995 5035,2385 ; 4985,1850 5115,1980 5115,2890 ; 5040,1815 5190,1965 5190,3420 ; 5480,1845 5630,1995 5630,2385 ; 5580,1850 5710,1980 5710,2890 ; 5635,1815 5785,1965 5785,3420 ; 6075,1845 6225,1995 6225,2385 ; 6175,1850 6305,1980 6305,2890 ; 6230,1815 6380,1965 6380,3420
  Bottom Layer w40: 2560,2780 2560,2485 2660,2385 ; 2560,3375 2560,3070 2740,2890 ; 2560,3970 2560,3675 2815,3420 ; 2560,4285 2560,4565 ; 2560,4850 2560,5160 ; 2560,5450 2560,5755 ; 2560,6055 2560,6350 ; 2760,1340 2830,1340 2910,1420 2910,2020 ; 3155,2780 3155,2485 3255,2385 ; 3155,3375 3155,3070 3335,2890 ; 3155,3970 3155,3675 3410,3420 ; 3155,4285 3155,4565 ; 3155,4850 3155,5160 ; 3155,5450 3155,5755 ; 3155,6055 3155,6350 ; 3355,1340 3425,1340 3505,1420 3505,2020 ; 3750,2780 3750,2485 3850,2385 ; 3750,3375 3750,3070 3930,2890 ; 3750,3970 3750,3675 4005,3420 ; 3750,4285 3750,4565 ; 3750,4850 3750,5160 ; 3750,5450 3750,5755 ; 3750,6055 3750,6350 ; 3950,1340 4020,1340 4100,1420 4100,2020 ; 4340,2780 4340,2485 4440,2385 ; 4340,3375 4340,3070 4520,2890 ; 4340,3970 4340,3675 4595,3420 ; 4340,4285 4340,4565 ; 4340,4850 4340,5160 ; 4340,5450 4340,5755 ; 4340,6055 4340,6350 ; 4540,1340 4610,1340 4690,1420 4690,2020 ; 4935,2780 4935,2485 5035,2385 ; 4935,3375 4935,3070 5115,2890 ; 4935,3970 4935,3675 5190,3420 ; 4935,4285 4935,4565 ; 4935,4850 4935,5160 ; 4935,5450 4935,5755 ; 4935,6055 4935,6350 ; 5135,1340 5205,1340 5285,1420 5285,2020 ; 5530,2780 5530,2485 5630,2385 ; 5530,3375 5530,3070 5710,2890 ; 5530,3970 5530,3675 5785,3420 ; 5530,4285 5530,4565 ; 5530,4850 5530,5160 ; 5530,5450 5530,5755 ; 5530,6055 5530,6350 ; 5730,1340 5800,1340 5880,1420 5880,2020 ; 6125,2780 6125,2485 6225,2385 ; 6125,3375 6125,3070 6305,2890 ; 6125,3970 6125,3675 6380,3420 ; 6125,4285 6125,4565 ; 6125,4850 6125,5160 ; 6125,5450 6125,5755 ; 6125,6055 6125,6350 ; 6325,1340 6395,1340 6475,1420 6475,2020

## Text inside footprints (layer, text, board x,y; h text height)
D1: Top Overlay "+" at 1853,5788 h47.24
D1_1: Top Overlay "+" at 2448,5788 h47.24
D1_2: Top Overlay "+" at 3043,5788 h47.24
D1_3: Top Overlay "+" at 3638,5788 h47.24
D1_4: Top Overlay "+" at 4228,5788 h47.24
D1_5: Top Overlay "+" at 4823,5788 h47.24
D1_6: Top Overlay "+" at 5418,5788 h47.24
D1_7: Top Overlay "+" at 6013,5788 h47.24
D2: Top Overlay "+" at 1853,5193 h47.24
D2_1: Top Overlay "+" at 2448,5193 h47.24
D2_2: Top Overlay "+" at 3043,5193 h47.24
D2_3: Top Overlay "+" at 3638,5193 h47.24
D2_4: Top Overlay "+" at 4228,5193 h47.24
D2_5: Top Overlay "+" at 4823,5193 h47.24
D2_6: Top Overlay "+" at 5418,5193 h47.24
D2_7: Top Overlay "+" at 6013,5193 h47.24
D3: Top Overlay "+" at 1853,4598 h47.24
D3_1: Top Overlay "+" at 2448,4598 h47.24
D3_2: Top Overlay "+" at 3043,4598 h47.24
D3_3: Top Overlay "+" at 3638,4598 h47.24
D3_4: Top Overlay "+" at 4228,4598 h47.24
D3_5: Top Overlay "+" at 4823,4598 h47.24
D3_6: Top Overlay "+" at 5418,4598 h47.24
D3_7: Top Overlay "+" at 6013,4598 h47.24
D4: Top Overlay "+" at 1853,6383 h47.24
D4_1: Top Overlay "+" at 2448,6383 h47.24
D4_2: Top Overlay "+" at 3043,6383 h47.24
D4_3: Top Overlay "+" at 3638,6383 h47.24
D4_4: Top Overlay "+" at 4228,6383 h47.24
D4_5: Top Overlay "+" at 4823,6383 h47.24
D4_6: Top Overlay "+" at 5418,6383 h47.24
D4_7: Top Overlay "+" at 6013,6383 h47.24
D5: Top Overlay "+" at 1853,2218 h47.24
D5_1: Top Overlay "+" at 2448,2218 h47.24
D5_2: Top Overlay "+" at 3043,2218 h47.24
D5_3: Top Overlay "+" at 3638,2218 h47.24
D5_4: Top Overlay "+" at 4228,2218 h47.24
D5_5: Top Overlay "+" at 4823,2218 h47.24
D5_6: Top Overlay "+" at 5418,2218 h47.24
D5_7: Top Overlay "+" at 6013,2218 h47.24
D6: Top Overlay "+" at 1853,4003 h47.24
D6_1: Top Overlay "+" at 2448,4003 h47.24
D6_2: Top Overlay "+" at 3043,4003 h47.24
D6_3: Top Overlay "+" at 3638,4003 h47.24
D6_4: Top Overlay "+" at 4228,4003 h47.24
D6_5: Top Overlay "+" at 4823,4003 h47.24
D6_6: Top Overlay "+" at 5418,4003 h47.24
D6_7: Top Overlay "+" at 6013,4003 h47.24
D7: Top Overlay "+" at 1853,2813 h47.24
D7_1: Top Overlay "+" at 2448,2813 h47.24
D7_2: Top Overlay "+" at 3043,2813 h47.24
D7_3: Top Overlay "+" at 3638,2813 h47.24
D7_4: Top Overlay "+" at 4228,2813 h47.24
D7_5: Top Overlay "+" at 4823,2813 h47.24
D7_6: Top Overlay "+" at 5418,2813 h47.24
D7_7: Top Overlay "+" at 6013,2813 h47.24
D8: Top Overlay "+" at 1853,3408 h47.24
D8_1: Top Overlay "+" at 2448,3408 h47.24
D8_2: Top Overlay "+" at 3043,3408 h47.24
D8_3: Top Overlay "+" at 3638,3408 h47.24
D8_4: Top Overlay "+" at 4228,3408 h47.24
D8_5: Top Overlay "+" at 4823,3408 h47.24
D8_6: Top Overlay "+" at 5418,3408 h47.24
D8_7: Top Overlay "+" at 6013,3408 h47.24